# EAGLE board Joystick Module A (EAGLE 8.4.1)
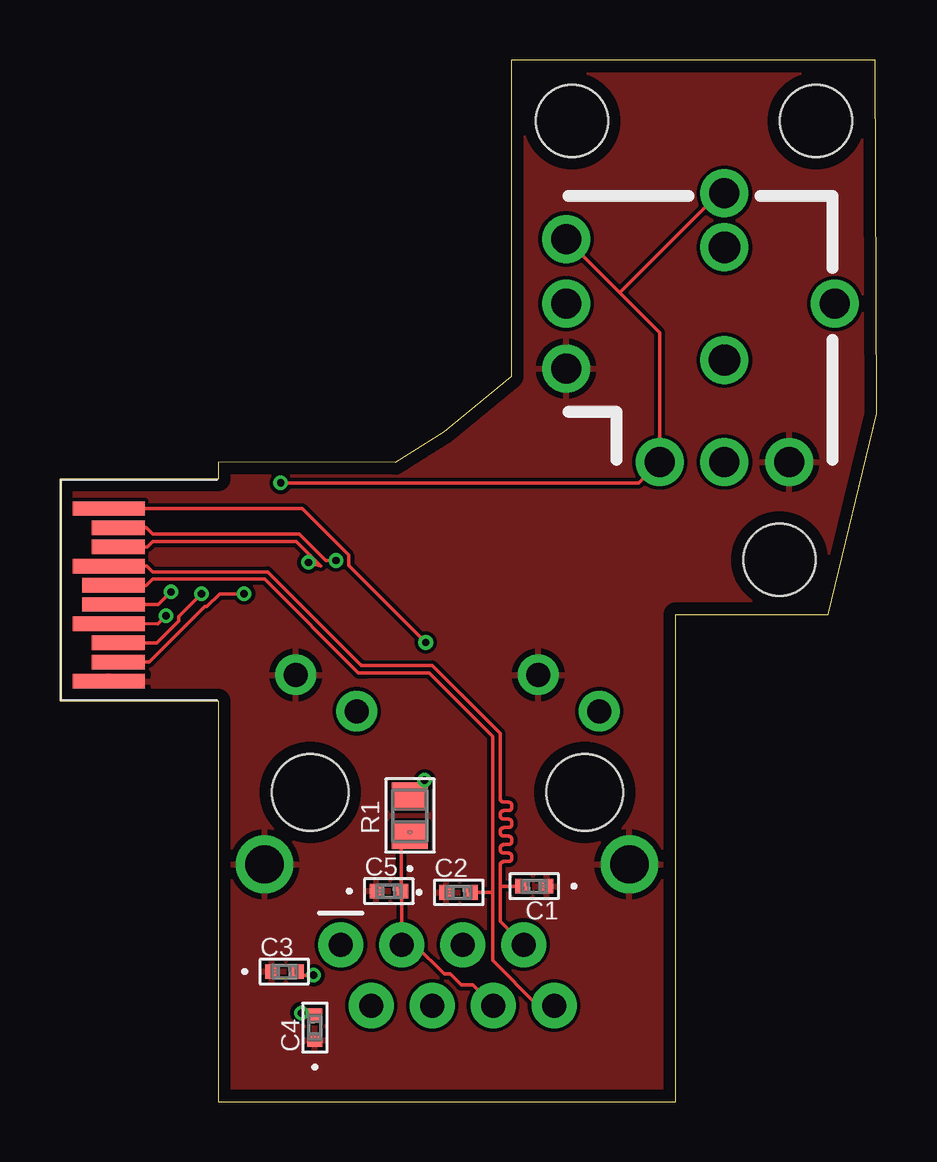
[diagram p0: board, top side]
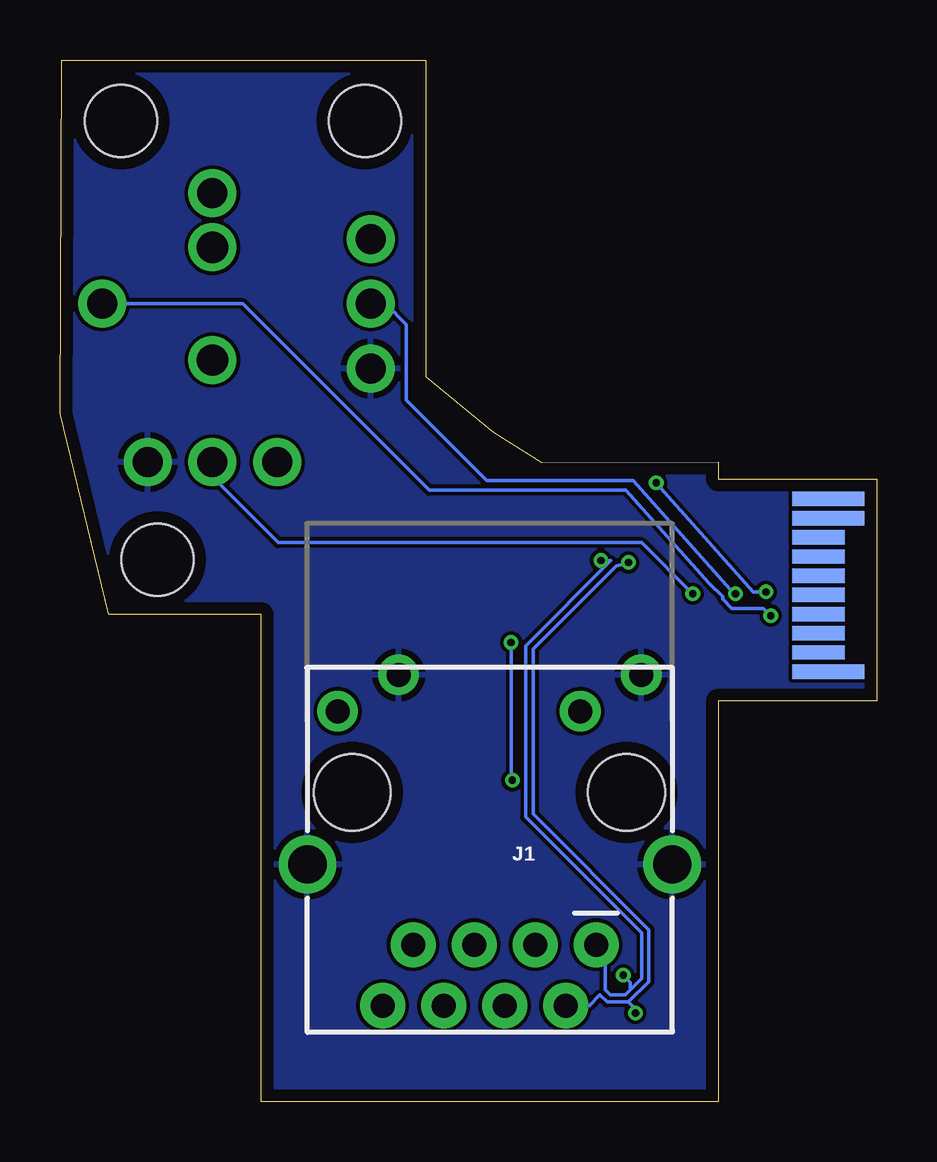
[diagram p1: board, bottom side, seen from below]

Size 34.04 x 43.43 mm. Coordinates in mm from the lower left corner, seen from the top.
Outline: 6.6,0 25.65,0 25.65,20.32 32,20.32 34.04,28.7 33.96,43.42 18.8,43.43 18.8,30.23 15.99,27.93 13.97,26.66 6.6,26.67 6.6,25.96 0,25.96 0,16.71 6.6,16.71 6.6,0
Copper layers (1*16): Top 0.035mm / dielectric 1.6mm / Bottom 0.035mm
Design rules "Elecrow_2-layer_PCB_eagle_rule *": minimum track width 6mil, minimum drill 12mil, track to track 6mil, track to pad 6mil, pad to pad 6mil, via to via 8mil, smd to smd 0mil, copper to edge 20mil, drill to drill 10mil, minimum pad ring 6mil, minimum via ring 6mil, stop-mask expansion 0mil, vias tented up to drill 100mil, thermal gap 10mil
Holes 3 mm at 29.97,22.61 21.34,40.89 31.5,40.89

## Footprints (pad centres in the part's own frame; a part is rotated, then mirrored left to right if it is on the bottom)
G-155-M = smd 0.559 x 0.61: 1 -0.521,0; 2 0.521,0
MAGJACK = drill 1 pad 1.88: 1 -4.445,6.015; 2 -3.175,8.555; 3 -1.905,6.015; 4 -0.635,8.555; 5 0.635,6.015; 6 1.905,8.555; 7 3.175,6.015; 8 4.445,8.555 | drill 1 pad 1.7: 9 -3.785,-3.715; 10 -6.325,-5.235; 11 6.325,-3.715; 12 3.785,-5.235 | drill 1.6 pad 2.184: M1 -7.62,2.67; M2 7.58,2.67 | hole 3.2: -5.715,-0.335; 5.715,-0.335
STA_RNCP0805-M = smd 1.118 x 1.499: 1 -0.826,0; 2 0.826,0
JOYSTICK = drill 1.25 pad 2: 1 -6.6,2.7; 1' -2.7,-6.6; 2 -6.6,0; 2' 0,-6.6; 3 -6.6,-2.7; 3' 2.7,-6.6; A 0,4.6; B 4.6,0 | drill 1.3 pad 2: P$9 0,2.35; P$10 0,-2.35
EDGE_CONNECTOR_20POS_CONTACTS = smd 0.6 x 3 bottom: 1 -3.4,0; 9 3,0; 10 3.8,0 | smd 0.6 x 2.2 bottom: 2 -2.6,-0.4; 3 -1.8,-0.4; 4 -1,-0.4; 5 -0.2,-0.4; 6 0.6,-0.4; 7 1.4,-0.4; 8 2.2,-0.4 | smd 0.6 x 3: 11 3.4,0; 14 1,0; 17 -1.4,0; 20 -3.8,0 | smd 0.6 x 2.2: 12 2.6,-0.4; 13 1.8,-0.4; 18 -2.2,-0.4; 19 -3,-0.4 | smd 0.6 x 2.6: 15 0.2,-0.2; 16 -0.6,-0.2

## Placement (x,y rotation side)
C1  16pF  [G-155-M]  19.76,8.99 180 top
C2  16pF  [G-155-M]  16.61,8.74 0 top
C3  16pF  [G-155-M]  9.35,5.44 0 top
C4  16pF  [G-155-M]  10.62,3.1 90 top
C5  22nF  [G-155-M]  13.7,8.79 0 top
J1  MAGJACK  [MAGJACK]  16.14,12.57 180 bottom
R1  10R  [STA_RNCP0805-M]  14.58,11.94 90 top
U$1  JOYSTICK"  [JOYSTICK]  27.69,33.27 0 top
U$2  EDGE_CONNECTOR_20POS_CONTACTS  [EDGE_CONNECTOR_20POS_CONTACTS]  2.03,21.34 90 top

## Library data of the parts
C1-C4 = 16pF-capacitor; MANUFACTURER_PART_NUMBER: GRM1555C1H160JA01D; VENDOR: Murata
C5 = 22nF-capacitor; MANUFACTURER_PART_NUMBER: GRM155R71H223KA12D; VENDOR: Murata
J1 = SparkFun-Connectors; PROD_ID: CONN-09556; SF_ID: PRT-08534
R1 = 10-resistor; COPYRIGHT: Copyright C 2015 Accelerated Designs. All rights reserved; MANUFACTURER_PART_NUMBER: RNCP0805FTD10R0; VENDOR: Vendor
U$1 U$2 = thanics_robotics

## Nets
3.3V_A: R1.2 U$2.11
+3V3: U$1.1 U$1.1' U$1.A U$2.16
GND: C1.1 C2.1 C3.1 C4.1 C5.1 J1.10 J1.12 J1.M1 J1.M2 U$1.3 U$1.3' U$2.20
J2_SW: U$1.B U$2.17
N$1: C5.2 J1.3 J1.6 R1.1
N$10: J1.11
N$12: J1.9
RX_N: C4.2 J1.2 U$2.13
RX_P: C3.2 J1.1 U$2.12
TX_N: C2.2 J1.8 U$2.15
TX_P: C1.2 J1.7 U$2.14
VRX: U$1.2 U$2.18
VRY: U$1.2' U$2.19

## Tracks (layer width: path | path; a pad name or v marks a point on that pad's centre or on a via)
3.3V_A  (via drill 0.3)
  Top 0.152: v15.19,13.41 15.19,13.37 R1.2 | v15.24,19.15 12.03,22.36 12.03,22.79 10.09,24.74 U$2.11
  Bottom 0.152: v15.24,19.15 15.24,13.46 v15.19,13.41
+3V3  (via drill 0.3)
  Top 0.152: U$2.16 4.09,20.73 v4.62,21.26 | v9.2,25.81 24.12,25.81 U$1.1' 24.99,32.07 23.32,33.74 | 23.32,33.74 U$1.1 | 23.32,33.74 27.46,37.87 U$1.A
  Bottom 0.152: v4.62,21.26 5.16,21.26 v9.2,25.81
GND
  pour Top: 0.05,48.41 35.05,48.26 35.05,-1.27 0.05,-1.12
  pour Bottom: 0,48.72 35.05,48.26 35.05,-1.27 0,-0.81
J2_SW  (via drill 0.3)
  Top 0.152: U$2.17 4.08,19.93 v4.42,20.27
  Bottom 0.152: v4.42,20.27 4.72,20.57 6.04,20.57 6.43,20.96 6.43,21.06 6.98,21.61 10.46,25.5 18.64,25.5 26.42,33.27 U$1.B
N$1
  Top 0.152: R1.1 14.22,10.76 C5.2 14.24,8.77 J1.3 14.78,6.56 16,5.33 16.26,5.33 16.71,4.88 17.19,4.88 J1.6
RX_N  (via drill 0.3)
  Top 0.152: C4.2 10.15,3.62 v10.06,3.71 | U$2.13 3.63,23.14 3.86,23.37 9.84,23.37 10.87,22.35 v10.35,22.49
  Bottom 0.152: 10.35,4.17 9.5,5.02 9.5,7.18 14.33,12 14.33,18.89 10.87,22.35 v10.35,22.49 | 10.35,4.17 11.24,4.17 11.54,4.46 11.99,4.02 J1.2 | v10.06,3.71 10.06,3.87 10.35,4.17
RX_P  (via drill 0.3)
  Top 0.152: C3.2 10.02,5.28 v10.57,5.28 | U$2.12 3.6,23.94 3.86,23.67 9.97,23.67 11.08,22.56 v11.5,22.57
  Bottom 0.152: 10.27,4.68 9.8,5.14 9.8,7.05 14.63,11.88 14.63,19.01 11.08,22.56 v11.5,22.57 | 10.27,4.68 10.48,4.47 11.11,4.47 11.32,4.68 11.32,6.18 J1.1 | v10.57,5.28 10.27,4.98 10.27,4.68
TX_N
  Top 0.152: 18.03,8.74 18.03,5.89 19.91,4.02 J1.8 | 18.03,8.74 18.03,15.23 15.38,17.88 12.65,17.88 | C2.2 18.03,8.74 | U$2.15 3.6,21.54 3.86,21.79 8.52,21.79 12.43,17.88 12.65,17.88 | 12.65,17.88 12.75,17.88
TX_P
  Top 0.152: 18.34,8.99 18.34,7.52 19.3,6.56 J1.7 | 18.34,8.99 18.34,9.87 arc-90 18.49,10.02 18.68,10.02 arc90 18.83,10.17 18.83,10.22 arc90 18.68,10.37 18.49,10.37 arc-90 18.34,10.53 18.34,10.57 arc-90 18.49,10.73 18.68,10.73 arc90 18.83,10.88 18.83,10.93 arc90 18.68,11.08 18.49,11.08 arc-90 18.34,11.23 18.34,11.28 arc-90 18.49,11.43 18.68,11.43 arc90 18.83,11.59 18.83,11.64 arc90 18.68,11.79 18.49,11.79 arc-90 18.34,11.94 18.34,11.99 arc-90 18.49,12.14 18.68,12.14 arc90 18.83,12.29 18.83,12.34 arc90 18.68,12.5 18.49,12.5 arc-90 18.34,12.65 18.34,15.35 15.51,18.19 12.56,18.19 8.65,22.1 3.86,22.1 3.62,22.34 U$2.14 | C1.2 18.34,8.99
VRX  (via drill 0.3)
  Top 0.152: v5.89,21.18 4.95,20.24 4.95,20.05 4.03,19.13 U$2.18
  Bottom 0.152: v5.89,21.18 5.94,21.18 10.16,25.91 16.26,25.91 19.61,29.26 19.61,32.41 20.47,33.27 U$1.2
VRY  (via drill 0.3)
  Top 0.152: U$2.19 3.71,18.34 6.02,20.65 6.11,20.65 6.65,21.18 v7.67,21.18
  Bottom 0.152: U$1.2' 27.69,26.06 24.94,23.32 9.8,23.32 v7.67,21.18